# EAGLE board MainFeederV1.0 (EAGLE 9.5.2)
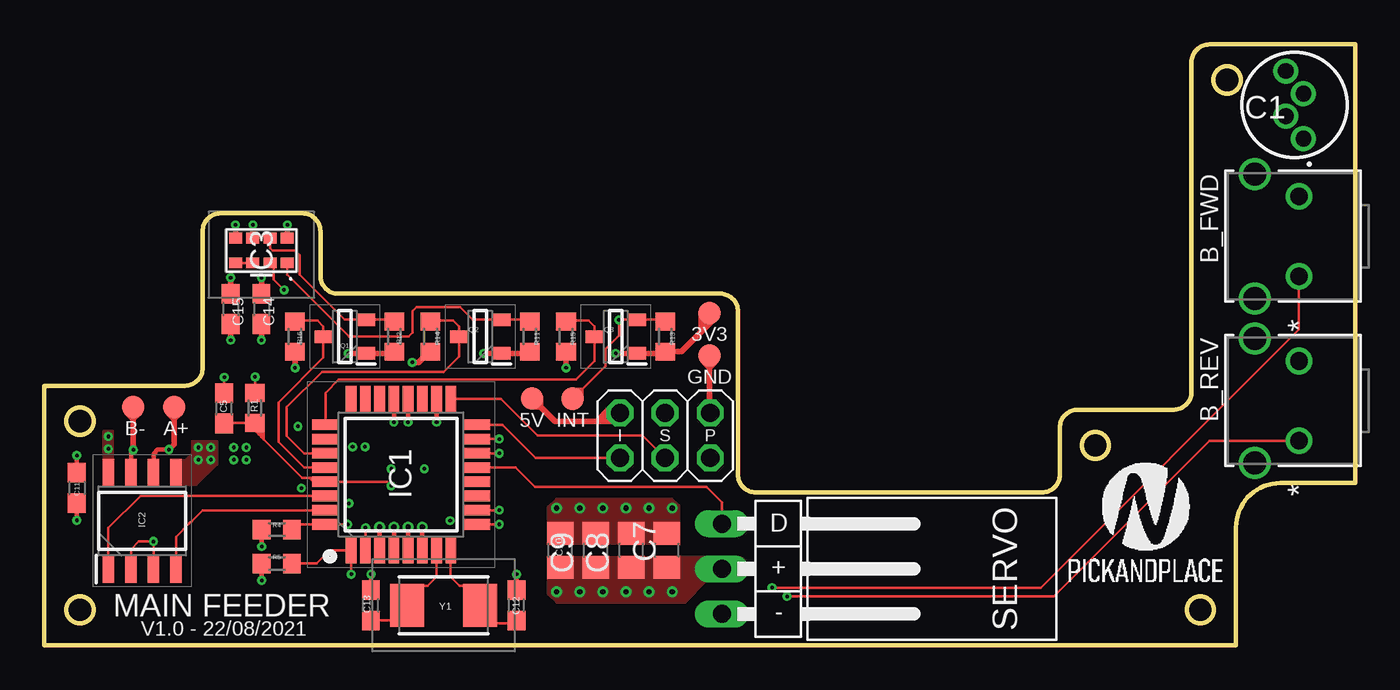
[diagram p0: board, top side]
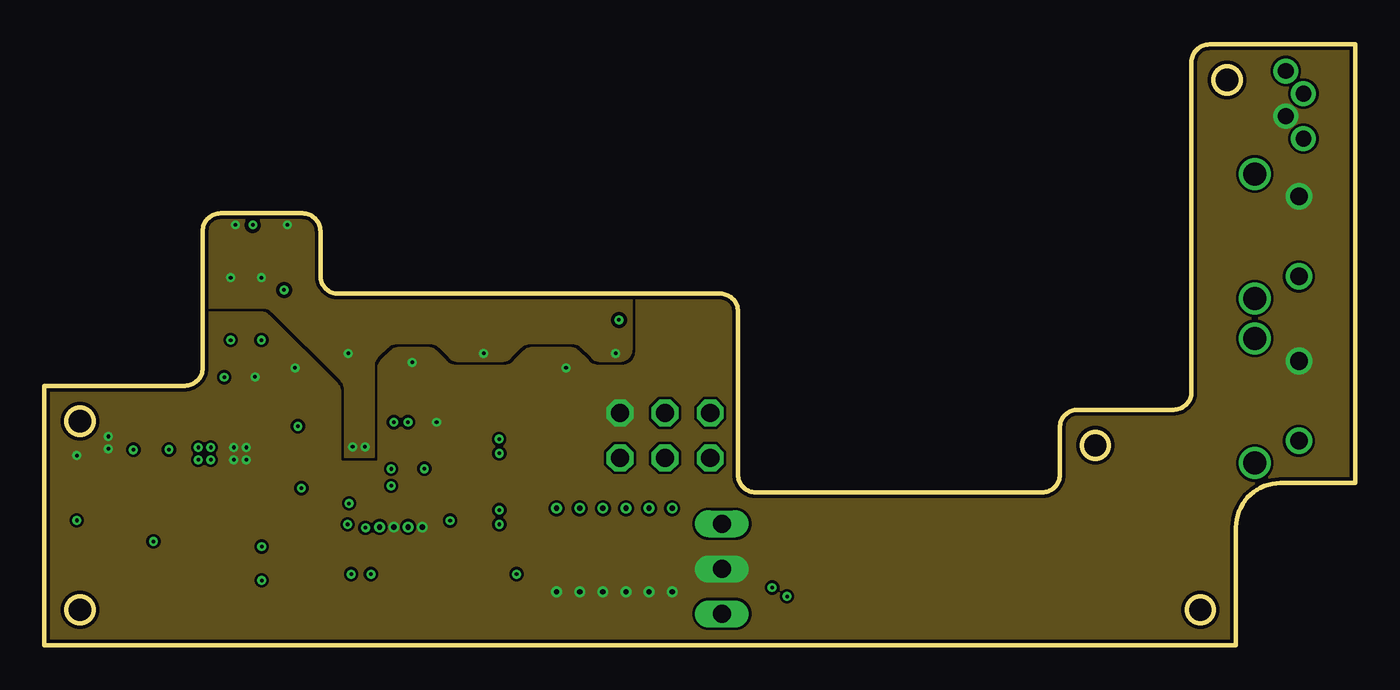
[diagram p1: board, inner layer Route2]
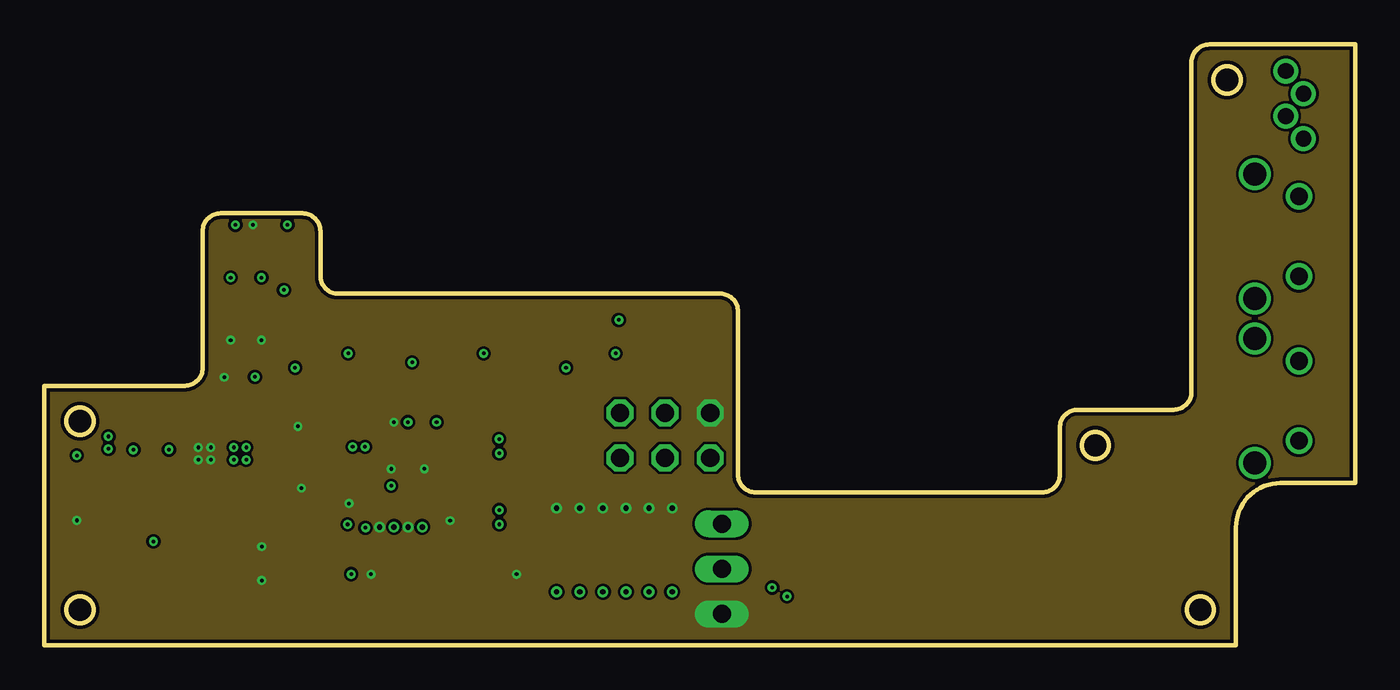
[diagram p2: board, inner layer Route15]
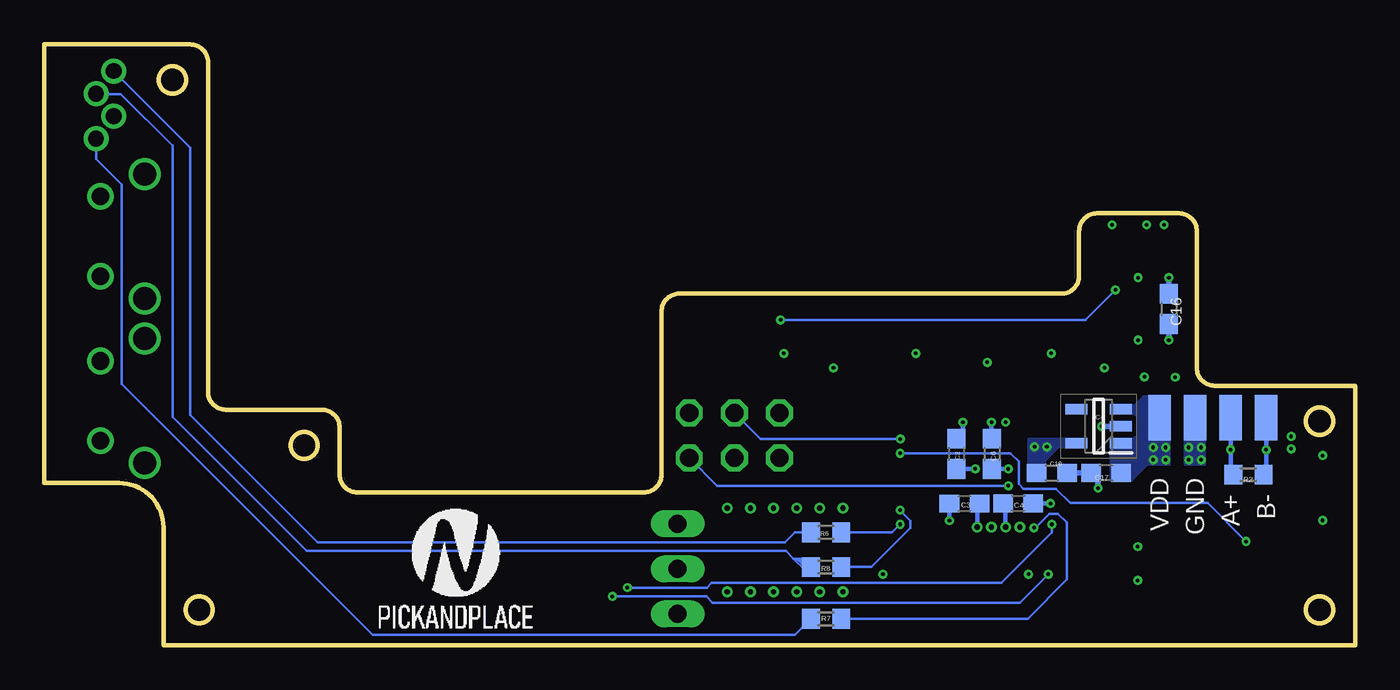
[diagram p3: board, bottom side, seen from below]

Size 73.7 x 33.8 mm. Coordinates in mm from the lower left corner, seen from the top.
Outline: 69.5,9.12 73.7,9.12 73.7,33.8 65.5,33.8 arc90 64.5,32.8 64.5,14.25 arc-90 63.5,13.25 58.1,13.25 arc90 57.1,12.25 57.1,9.6 arc-90 56.1,8.6 40,8.6 arc-90 39,9.6 39,18.78 arc90 38,19.78 16.52,19.78 arc-90 15.52,20.78 15.52,23.3 arc90 14.52,24.3 9.9,24.3 arc90 8.9,23.3 8.9,15.6 arc-90 7.9,14.6 0,14.6 0,0 67,0 67,6.62 arc-90 69.5,9.12
Outline: circle at 66.5,31.8 radius 0.75
Outline: circle at 65,2 radius 0.75
Outline: circle at 59.1,11.25 radius 0.75
Outline: circle at 2,2 radius 0.75
Outline: circle at 2,12.6 radius 0.75
Copper layers (1+2*15+16): Top 0.035mm / dielectric 0.2mm / Route2 0.018mm / dielectric 1.5mm / Route15 0.018mm / dielectric 0.2mm / Bottom 0.035mm
Design rules "aisler_4_layer": minimum track width 0.1mm, minimum drill 0.2mm, track to track 0.15mm, track to pad 0.1mm, pad to pad 0.1mm, via to via 0.1mm, smd to smd 0.1mm, copper to edge 0.2mm, drill to drill 0.21mm, minimum pad ring 0.25mm, minimum via ring 0.15mm, stop-mask expansion 0mil, vias tented up to drill 0mil, thermal gap 10mil

## Footprints (pad centres in the part's own frame; a part is rotated, then mirrored left to right if it is on the bottom)
L-154A4SUREQBFZGEC = drill 0.889 pad 1.4: 1 0.5,-1.905; 2 -0.5,-0.635; 3 0.5,0.635; 4 -0.5,1.905
C0603 = smd 1.1 x 1: 1 -0.85,0; 2 0.85,0
C0805 = smd 1.3 x 1.5: 1 -0.95,0; 2 0.95,0
QFP80P900X900X120-32N = smd 1.5 x 0.6: 1 -4.25,2.8; 2 -4.25,2; 3 -4.25,1.2; 4 -4.25,0.4; 5 -4.25,-0.4; 6 -4.25,-1.2; 7 -4.25,-2; 8 -4.25,-2.8; 17 4.25,-2.8; 18 4.25,-2; 19 4.25,-1.2; 20 4.25,-0.4; 21 4.25,0.4; 22 4.25,1.2; 23 4.25,2; 24 4.25,2.8 | smd 0.6 x 1.5: 9 -2.8,-4.25; 10 -2,-4.25; 11 -1.2,-4.25; 12 -0.4,-4.25; 13 0.4,-4.25; 14 1.2,-4.25; 15 2,-4.25; 16 2.8,-4.25; 25 2.8,4.25; 26 2,4.25; 27 1.2,4.25; 28 0.4,4.25; 29 -0.4,4.25; 30 -1.2,4.25; 31 -2,4.25; 32 -2.8,4.25
SOIC127P600X175-8N = smd 1.525 x 0.65: 1 -2.712,1.905; 2 -2.712,0.635; 3 -2.712,-0.635; 4 -2.712,-1.905; 5 2.712,-1.905; 6 2.712,-0.635; 7 2.712,0.635; 8 2.712,1.905
LTR559ALS01 = smd 0.6 x 0.72: 1 0.7,1.455; 2 0.7,0.485; 3 0.7,-0.485; 4 0.7,-1.455; 5 -0.7,-1.455; 6 -0.7,-0.485; 7 -0.7,0.485; 8 -0.7,1.455
SOT95P275X110-5N = smd 1.25 x 0.6: 1 -1.25,0.95; 2 -1.25,0; 3 -1.25,-0.95; 4 1.25,-0.95; 5 1.25,0.95
1X03/90 = drill 1.016 long: 1 -2.54,-3.81; 2 0,-3.81; 3 2.54,-3.81
2X03 = drill 1.016 octagon: 1 -2.54,-1.27; 2 -2.54,1.27; 3 0,-1.27; 4 0,1.27; 5 2.54,-1.27; 6 2.54,1.27
SMD1,27-2,54 = smd 1.27 x 2.54: 1 0,0
SOT95P240X120-3N = smd 1 x 0.7: 1 -1.2,0.95; 2 -1.2,-0.95; 3 1.2,0
R0603 = smd 1 x 1.1: 1 -0.85,0; 2 0.85,0
SW2_1825027-A_TEC = drill 0.991 pad 1.499: 1 0,0; 2 4.496,0 | drill 1.295 pad 1.803: 3 -1.245,2.489; 4 5.766,2.489
B1,27 = smd 1.27 x 1.27: TP 0,0
ECS1601230AEMTR = smd 1.9 x 2.4: 1 -2.05,0; 2 2.05,0

## Placement (x,y rotation side)
C1  WP154A4SEJ3VBDZGC_CA  [L-154A4SUREQBFZGEC]  70.3,30.4 0 top
C2  1uF  [C0603]  22.42,10.77 270 bottom
C3  100nF  [C0603]  21.96,7.97 180 bottom
C4  100nF  [C0603]  18.95,7.98 0 bottom
C5  100nF  [C0603]  10.11,13.33 90 top
C6  100nF  [C0603]  20.42,10.77 270 bottom
C7  100uF  [C0805]  35,5.34 90 top
C8  100uF  [C0805]  33,5.34 90 top
C9  100uF  [C0805]  31,5.34 90 top
C10  100uF  [C0805]  29,5.34 90 top
C11  100nF  [C0603]  1.82,8.85 270 top
C12  12pF  [C0603]  26.55,2.25 90 top
C13  12pF  [C0603]  18.35,2.25 90 top
C14  1uF  [C0603]  12.2,18.92 270 top
C15  1uF  [C0603]  10.47,18.92 270 top
C16  100nF  [C0603]  10.47,18.92 270 bottom
C17  1uF  [C0603]  14,9.7 180 bottom
C18  1uF  [C0603]  17.05,9.7 0 bottom
IC1  ATMEGA328-AU  [QFP80P900X900X120-32N]  20.05,9.6 90 top
IC2  MAX485CSA+T  [SOIC127P600X175-8N]  5.5,7 90 top
IC3  LTR-559ALS-01  [LTR559ALS01]  12.2,22.21 270 top
IC4  NCP164CSN330T1G  [SOT95P275X110-5N]  14.41,12.32 180 bottom
JP1  [1X03/90]  41.9,4.3 270 top
JP2  [2X03]  34.9,11.8 0 top
PAD1  [SMD1,27-2,54]  7,12.8 0 bottom
PAD2  [SMD1,27-2,54]  5,12.8 0 bottom
PAD3  [SMD1,27-2,54]  9,12.8 0 bottom
PAD4  [SMD1,27-2,54]  11,12.8 0 bottom
Q1  BSS138  [SOT95P240X120-3N]  16.89,17.37 180 top
Q2  BSS138  [SOT95P240X120-3N]  24.5,17.37 180 top
Q3  BSS138  [SOT95P240X120-3N]  32.12,17.37 180 top
R1  10K  [R0603]  11.84,13.35 90 top
R2  220  [R0603]  6,9.6 180 bottom
R4  10K  [R0603]  13.07,6.5 0 top
R5  10K  [R0603]  13.07,4.6 0 top
R6  560  [R0603]  29.75,6.35 180 bottom
R7  560  [R0603]  29.75,1.49 180 bottom
R8  560  [R0603]  29.75,4.4 180 bottom
R11  10K  [R0603]  27.3,17.37 270 top
R12  10K  [R0603]  19.68,17.37 270 top
R13  10K  [R0603]  34.92,17.37 270 top
R14  10K  [R0603]  21.71,17.37 270 top
R15  10K  [R0603]  29.33,17.37 270 top
R16  10K  [R0603]  14.09,17.37 270 top
SW1  1-1825027-1  [SW2_1825027-A_TEC]  70.55,11.5 90 top
SW2  1-1825027-1  [SW2_1825027-A_TEC]  70.55,20.75 90 top
TP1  TPB1,27  [B1,27]  37.4,18.7 0 top
TP2  TPB1,27  [B1,27]  37.4,16.3 0 top
TP3  TPB1,27  [B1,27]  27.41,13.89 0 top
TP4  TPB1,27  [B1,27]  5,13.4 0 top
TP5  TPB1,27  [B1,27]  7.3,13.4 0 top
TP6  TPB1,27  [B1,27]  29.7,13.87 0 top
U$2  [NPNP_LARGE_TEXT]  61.9,7.5 0 top
U$3  [NPNP_LARGE_TEXT]  50.6,4.9 0 bottom
Y1  ECS-160-12-30-AEM-TR  [ECS1601230AEMTR]  22.45,2.25 180 top

## Library data of the parts
C1 = SamacSys_Parts; DESCRIPTION: Standard LEDs - Through Hole 5MM RGB LED; HEIGHT: mm; MANUFACTURER_NAME: Kingbright; MANUFACTURER_PART_NUMBER: WP154A4SEJ3VBDZGC/CA; MOUSER_PART_NUMBER: 604-WP154A43VBDZGCCA; MOUSER_PRICE-STOCK: https://www.mouser.co.uk/ProductDetail/Kingbright/WP154A4SEJ3VBDZGC-CA?qs=YCa%2FAAYMW01T13YiwBKGSw%3D%3D
C2-C18 = rcl; SPICEPREFIX: C
IC1 = SamacSys_Parts; DESCRIPTION: MCU 8-Bit AVR 32KB Flash 2.5/3.3/5V ATMEGA328-AU, 8 bit AVR Microcontroller 20MHz 32 kB Flash, 1 kB, 2 kB RAM, I2C 32-Pin TQFP; HEIGHT: 1.2mm; MANUFACTURER_NAME: Microchip; MANUFACTURER_PART_NUMBER: ATMEGA328-AU; MOUSER_PART_NUMBER: 556-ATMEGA328-AU; MOUSER_PRICE-STOCK: https://www.mouser.co.uk/ProductDetail/Microchip-Technology-Atmel/ATMEGA328-AU?qs=lwdSMh1%2FoYJRHuGBjWz9Pg%3D%3D
IC2 = SamacSys_Parts; DESCRIPTION: RS-422/RS-485 Interface IC Low-Power, Slew-Rate-Limited RS-485/RS-422 Transceivers; HEIGHT: 1.75mm; MANUFACTURER_NAME: Maxim Integrated; MANUFACTURER_PART_NUMBER: MAX485CSA+T; MOUSER_PART_NUMBER: 700-MAX485CSAT; MOUSER_PRICE-STOCK: https://www.mouser.co.uk/ProductDetail/Maxim-Integrated/MAX485CSA%2bT?qs=LHmEVA8xxfYLnNxfn7yuwQ%3D%3D
IC3 = SamacSys_Parts; DESCRIPTION: Light to Digital Converters Ambient Light Photo Sensor; HEIGHT: 1.5mm; MANUFACTURER_NAME: Lite-On; MANUFACTURER_PART_NUMBER: LTR-559ALS-01; MOUSER_PART_NUMBER: 859-LTR559ALS01; MOUSER_PRICE-STOCK: https://www.mouser.co.uk/ProductDetail/Lite-On/LTR-559ALS-01?qs=g5ciJ0jwZaFszfH9HZ6uUw%3D%3D
IC4 = SamacSys_Parts; DESCRIPTION: LDO Regulator Pos 3.3V 0.3A 5-Pin TSOP T/R; HEIGHT: 1.1mm; MANUFACTURER_NAME: ON Semiconductor; MANUFACTURER_PART_NUMBER: NCP164CSN330T1G; MOUSER_PART_NUMBER: 863-NCP164CSN330T1G; MOUSER_PRICE-STOCK: https://www.mouser.co.uk/ProductDetail/ON-Semiconductor/NCP164CSN330T1G?qs=xZ%2FP%252Ba9zWqbi%2FAyy5UtoRw%3D%3D
JP1 JP2 = pinhead
PAD1-PAD4 = wirepad
Q1-Q3 = SamacSys_Parts; DESCRIPTION: N-channel MOSFET,BSS138 0.2A 50V; HEIGHT: 1.2mm; MANUFACTURER_NAME: ON Semiconductor; MANUFACTURER_PART_NUMBER: BSS138; MOUSER_PART_NUMBER: 512-BSS138; MOUSER_PRICE-STOCK: https://www.mouser.co.uk/ProductDetail/ON-Semiconductor-Fairchild/BSS138?qs=HK%252BeIG1iaahCeqBvjB4arg%3D%3D
R1 R2 R4-R8 R11-R16 = rcl; SPICEPREFIX: R
SW1 SW2 = PNPFeeder; BUILT_BY: EMA_UL_Team; CONFIGURATION__POLE-THROW_: Single Pole - Single Throw; CONTACT_CURRENT_RATING: 50; COPYRIGHT: Copyright (C) 2016 Accelerated Designs. All rights reserved; DESCRIPTION: FSMRA4JH04=R/A,TACT PB SW,160G; MANUFACTURER_PART_NUMBER: 1-1825027-1; MAX_SWITCHING_CURRENT: -; MAX_SWITCHING_VOLTAGE_AC_: -; PRODUCT_TYPE: Switch; SOURCELIBRARY: TE_Connectivity-2018-03-16; SWITCH_TYPE: Tactile Switches; TE_INTERNAL_NUMBER: 1-1825027-1; TE_PART_NUMBER: 1-1825027-1; VENDOR: TE Connectivity; VOLTAGE_RATING: -
TP1-TP6 = testpad
U$2 U$3 = PNPFeeder
Y1 = SamacSys_Parts; DESCRIPTION: ECX-53 SMD CRYSTAL; HEIGHT: 1.4mm; MANUFACTURER_NAME: ECS; MANUFACTURER_PART_NUMBER: ECS-160-12-30-AEM-TR; MOUSER_PART_NUMBER: 520-160-12-30-AEM-TR; MOUSER_PRICE-STOCK: https://www.mouser.co.uk/ProductDetail/ECS/ECS-160-12-30-AEM-TR?qs=DRkmTr78QAR%252BNhBpMq%2FA3Q%3D%3D

## Nets
3V3: C14.1 C15.1 C16.1 C18.1 IC3.5 IC3.8 IC4.5 Q1.1 Q2.1 Q3.1 R11.2 R12.2 R13.2 TP1.TP
!RESET: C5.1 IC1.29 JP2.5 R1.1
A+: IC2.6 PAD1.1 R2.2 TP5.TP
B-: IC2.7 PAD2.1 R2.1 TP4.TP
BUTTON_A: IC1.32 R4.2 SW2.1
BUTTON_B: IC1.1 R5.2 SW1.1
C_SERVO: IC1.13 JP1.1
CTRL: IC1.14 IC2.2 IC2.3
GND: C2.2 C3.2 C4.2 C5.2 C6.2 C7.2 C8.2 C9.2 C10.2 C11.2 C12.2 C13.2 C14.2 C15.2 C16.2 C17.2 C18.2 IC1.3 IC1.5 IC1.21 IC2.5 IC3.6 IC4.2 JP1.3 JP2.6 PAD3.1 R4.1 R5.1 TP2.TP
INT: IC1.25 Q3.3 R15.1
INT_3V3: IC3.2 Q3.2 R13.1 TP6.TP
L_B: IC1.10 R8.1
L_G: IC1.9 R6.1
L_R: IC1.2 R7.1
MISO: IC1.16 JP2.1
MOSI: IC1.15 JP2.4
N$1: C6.1 IC1.20
N$2: C1.3 R8.2
N$3: C1.1 R7.2
N$4: IC3.3 IC3.4
N$6: C12.1 IC1.8 Y1.1
N$7: C1.4 R6.2
N$8: C13.1 IC1.7 Y1.2
RX: IC1.30 IC2.1
SCK: IC1.17 JP2.3
SCL: IC1.28 Q1.3 R16.1
SCL_3V3: IC3.7 Q1.2 R12.1
SDA: IC1.27 Q2.3 R14.1
SDA_3V3: IC3.1 Q2.2 R11.1
TX: IC1.31 IC2.4
VDD: C1.2 C2.1 C3.1 C4.1 C7.1 C8.1 C9.1 C10.1 C11.1 C17.1 IC1.4 IC1.6 IC1.18 IC2.8 IC4.1 IC4.3 JP1.2 JP2.2 PAD4.1 R1.2 R14.2 R15.2 R16.2 SW1.2 SW2.2 TP3.TP

## Tracks (layer width: path | path; a pad name or v marks a point on that pad's centre or on a via)
3V3  (via drill 0.2)
  Top 0.305: R12.2 19.58,16.42 Q1.1 v17.08,16.42 | R11.2 27.2,16.42 Q2.1 v24.7,16.42 | v32.12,16.42 Q3.1 34.82,16.42 R13.2 35.82,16.52 36.92,17.62 | IC3.8 v13.66,23.64 v13.66,23.65 | C16.1 v10.47,20.68 | TP1.TP 37.58,18.52 37.58,18.28 37.05,17.75 | 36.92,17.62 37.05,17.75 | 37.05,17.75 37.05,18.35 TP1.TP | TP1.TP 36.92,18.7 36.92,17.62 | C14.1 v12.2,20.68 | IC3.5 v10.74,23.64 v10.74,23.65
  Bottom 0.305: C16.1 v10.47,20.68
  other vias: 18.03,11.16 17.33,11.16
  pour Bottom (no thermals): 15.16,11.16 16.65,11.16 17.43,10.38 17.43,10.09 18.37,10.09 18.38,10.08 18.38,11.6 15.41,11.6 15.16,11.35
  pour Route2 (isolate 0.2): 16.9,10.6 18.5,10.6 18.5,15.74 arc-45 18.69,16.19 19.31,16.81 arc-45 19.76,17 21.74,17 arc-45 22.19,16.81 22.81,16.19 arc45 23.26,16 25.74,16 arc45 26.19,16.19 26.81,16.81 arc-45 27.26,17 29.74,17 arc-45 30.19,16.81 30.81,16.19 arc45 31.26,16 32.37,16 arc90 33,16.63 33,20 17,20 16,21 16,25 8,25 8,19 12.34,19 arc-45 12.79,18.81 16.71,14.89 arc-45 16.9,14.44
!RESET  (via drill 0.2)
  Top 0.15: IC1.29 15.58,9.42 14.88,9.42 | 14.88,9.42 14.48,9.42 12.32,11.58 | IC1.29 15.1,9.2 14.88,9.42 | R1.1 11.84,12.06 12.05,11.85 | 12.05,11.85 12.19,11.71 | 12.19,11.71 12.32,11.58 | R1.1 12.32,12.02 12.32,11.58 | R1.1 12.19,12.15 12.19,11.71 | R1.1 12.05,12.29 12.05,11.85 | R1.1 10.13,12.5 C5.1 | IC1.29 19,9.2 19.07,9.2 19.27,9.2 v19.5,8.97
  Bottom 0.15: JP2.5 35.88,8.97 v19.5,8.97
A+  (via drill 0.2)
  Top 0.254: v7,11.01 6.38,11.01 6.13,10.77 IC2.6
  Top 0.305: TP5.TP 7.3,12.72 | v7,11.01 7.3,11.31 7.3,12.72 | 7.3,12.72 7.66,13.08 | 7.3,12.72 6.98,13.04
  Bottom 0.254: PAD1.1 v7,11.01 7,9.75 R2.2
B-  (via drill 0.2)
  Top 0.254: IC2.7 4.87,10.87 v5,11
  Top 0.305: TP4.TP 5,12.72 | v5,11 5,12.72 | 5,12.72 4.63,13.09 | 5,12.72 5.36,13.08
  Bottom 0.254: PAD2.1 v5,11 5,9.75 R2.1
BUTTON_A  (via drill 0.2)
  Top 0.15: SW2.1 70.55,17.75 56.05,3.25 v40.92,3.25 | R4.2 13.92,6.8 IC1.32 v17.05,6.8
  Bottom 0.15: v40.92,3.25 36.45,3.25 36.18,3.52 19.88,3.52 17.05,6.35 v17.05,6.8
BUTTON_B  (via drill 0.2)
  Top 0.15: SW1.1 65.5,11.5 56.75,2.75 v41.76,2.75 | R5.2 15.3,4.6 16.05,5.35 IC1.1 v17.25,4
  Bottom 0.15: v41.76,2.75 36.47,2.75 36.12,2.4 18.85,2.4 v17.25,4
C_SERVO
  Top 0.15: JP1.1 38.09,8.05 37.24,8.9 27.58,8.9 26.48,10 IC1.13
CTRL  (via drill 0.2)
  Top 0.15: IC2.3 v6.13,5.83 v6.13,5.84 5.3,5.84 4.87,5.4 IC2.2 | IC1.14 v25.58,10.8
  Bottom 0.15: v6.13,5.84 v6.13,5.85 8.28,8 16,8 16.81,8.81 18.65,8.81 18.91,9.07 18.91,10.33 19.38,10.8 v25.58,10.8
GND  (via drill 0.2, 0.3)
  Top 0.15: C5.2 v10.11,15.08
  Top 0.254: R4.1 v12.22,5.55 | R5.1 v12.22,3.65 | IC1.3 v18.85,6.65 | IC1.5 v20.45,6.65 | IC1.21 v19.65,12.55 | C11.2 v1.82,7.03 | C13.2 v18.36,4 | C12.2 v26.55,4
  Top 0.305: IC3.6 v11.72,23.64 v11.72,23.65 | C14.2 v12.2,17.17 | C16.2 v10.47,17.17 | TP2.TP 37.4,15.62 | 37.4,15.62 37.4,13.11 JP2.6 | 37.4,15.62 37.08,15.94 37.08,16.22 | 37.72,16.2 37.72,15.94 37.4,15.62
  Bottom 0.254: C4.2 v17.13,7.98 | C3.2 v22.81,7.01 | C6.2 v19.5,9.92 | C2.2 v21.37,9.92 v21.36,9.93
  Bottom 0.305: IC4.2 v14.25,12.32 | C18.2 C17.2 14.45,9.3 v14.45,8.84 | C16.2 v10.47,17.17
  other vias: 9.35,11.13 9.35,10.43 8.65,10.43 8.65,11.13 28.8,7.71 30.1,7.71 31.4,7.71 32.7,7.71 34,7.71 35.3,7.71
  pour Route15 (no thermals): 76,37 -4,37 -4,-3 76,-3
  pour Bottom (no thermals): 9.56,12.8 8.44,12.8 8.44,10.18 9.56,10.18
  pour Top (no thermals): 28.33,5.72 35.67,5.72 35.67,7.87 35.28,8.24 28.78,8.24 28.33,7.78
  pour Top (no thermals): 7.2,10.4 7.91,10.4 8.3,10.79 8.3,11.46 9.7,11.46 9.7,10.18 8.54,9.03 7.2,9.03
INT
  Top 0.15: R15.1 29.37,18.26 30.6,18.26 30.93,17.93 Q3.3 30.93,15.99 29.89,14.95 16.55,14.95 15.8,14.2 IC1.25
INT_3V3  (via drill 0.2)
  Top 0.15: R13.1 34.82,18.32 Q3.2 32.32,18.32 v32.3,18.3 32.3,17.42 31.54,16.66 31.54,15.71 30.26,14.43 | v13.47,19.99 12.88,20.57 12.88,21.31 IC3.2 | 29.84,13.87 TP6.TP 30.26,14.43 | 30.26,14.43 29.68,14.43 | 30.26,14.43 30.26,13.86 29.92,13.52
  Bottom 0.15: v32.3,18.3 15.17,18.3 v13.48,19.99 v13.47,19.99
L_B  (via drill 0.2)
  Top 0.15: IC1.10 v25.58,7.6
  Bottom 0.15: v25.58,7.6 25.58,7.58 25,7 25,6.59 27.19,4.4 R8.1
L_G  (via drill 0.2)
  Top 0.15: IC1.9 v25.58,6.8
  Bottom 0.15: R6.1 26.03,6.35 v25.58,6.8
L_R  (via drill 0.2)
  Top 0.15: IC1.2 v18.05,6.61
  Bottom 0.15: R7.1 18.41,1.49 16.2,3.7 16.2,6.9 16.7,7.4 17.2,7.4 17.99,6.61 v18.05,6.61
MISO
  Top 0.15: JP2.1 27.63,10.53 25.76,12.4 IC1.16
MOSI  (via drill 0.2)
  Top 0.15: IC1.15 v25.57,11.6
  Bottom 0.15: v25.57,11.6 33.43,11.6 JP2.4
N$1  (via drill 0.2)
  Top 0.254: IC1.20 v20.44,12.55
  Bottom 0.254: C6.1 20.44,11.64 v20.44,12.55
N$2
  Bottom 0.15: C1.3 70.77,31 69.4,31 66.5,28.1 66.5,12.85 58.95,5.3 32,5.3 31.57,4.87 | 31.57,4.87 31.4,4.87 | 31.4,4.87 30.82,4.87 30.6,4.65 R8.2 | R8.2 30.73,4.27 30.97,4.27 31.57,4.87 | R8.2 30.93,4.4 31.27,4.74 | 31.27,4.74 31.4,4.87 | R8.2 30.94,4.74 31.27,4.74
N$3
  Bottom 0.15: C1.1 70.8,27.36 69.35,25.91 69.35,14.71 55.24,0.6 31.49,0.6 R7.2
N$4
  Top 0.15: IC3.3 IC3.4
N$6
  Top 0.15: C12.1 26.4,1.25 24.35,1.25 24.5,1.4 Y1.1 24.05,2.7 24.05,3.35 23.35,3.35 22.85,3.85 IC1.8
N$7
  Bottom 0.15: C1.4 65.5,28 65.5,12.95 58.35,5.8 32.05,5.8 31.5,6.35 R6.2
N$8
  Top 0.15: C13.1 19.55,1.4 Y1.2 20.4,2.7 21.05,3.35 21.55,3.35 22.05,3.85 IC1.7
RX
  Top 0.15: IC2.1 3.59,6.59 5.4,8.4 IC1.30
SCK
  Top 0.15: JP2.3 33.63,11.8 27.72,11.8 25.67,13.85 IC1.17
SCL
  Top 0.15: R16.1 14.13,18.26 15.36,18.26 15.68,17.93 Q1.3 15.68,16.19 13.16,13.67 13.16,11.44 14.6,10 IC1.28
SCL_3V3
  Top 0.15: R12.1 19.58,18.32 Q1.2 16.89,18.32 14.36,20.85 14.36,21.94 14.11,22.19 12.84,22.19 12.69,22.34 IC3.7
SDA
  Top 0.15: R14.1 21.75,18.26 22.98,18.26 23.3,17.93 Q2.3 23.3,16.25 22.44,15.38 15.61,15.38 13.63,13.4 13.63,11.78 14.61,10.8 IC1.27
SDA_3V3
  Top 0.15: R11.1 27.2,18.32 Q2.2 24.06,18.32 23.36,19.02 20.92,19.02 20.7,18.8 20.7,17.6 20.47,17.37 17.14,17.37 13.66,20.86 IC3.1
TX
  Top 0.15: IC2.4 7.4,6.1 8.15,6.85 8.3,7 8.9,7.6 IC1.31
VDD  (via drill 0.2, 0.3)
  Top 0.15: R1.2 v11.84,15.1
  Top 0.254: IC1.4 v19.65,6.65 | IC1.6 v21.25,6.65 | IC1.18 v22.05,12.55 | C11.1 v1.82,10.68
  Top 0.305: R14.2 21.66,16.52 21.05,15.91 v20.68,15.91 | R16.2 v14.09,15.61 | R15.2 v29.33,15.61 | TP3.TP 27.89,13.41 | 27.89,13.41 28.72,12.58 31.19,12.58 | JP2.2 31.87,12.58 31.19,12.58 | JP2.2 32.09,13.34 31.78,13.34 31.06,12.62 31.23,12.62 | 31.23,12.62 31.45,12.84 32.13,12.84 JP2.2 | 31.23,12.62 31.19,12.58 | 27.89,13.41 27.38,13.41 | 27.89,13.41 27.89,13.89
  Bottom 0.254: C4.1 19.65,7.83 v19.65,6.65 | v21.25,6.65 21.25,7.83 C3.1 | C2.1 22.05,11.99 v22.05,12.55
  other vias: 11.35,11.13 11.35,10.43 10.65,11.13 28.8,3.01 30.1,3.01 31.4,3.01 32.7,3.01 34,3.01 35.3,3.01 10.65,10.43 3.59,11.75 3.59,11.05
  pour Route2 (rank 2, no thermals): 75,36 -2,36 -2,-3 75,-3
  pour Bottom (no thermals): 13.7,13.5 12.4,13.5 11.91,13.99 10.99,13.99 10.44,13.5 10.44,10.18 11.65,10.18 12.55,9.28 13.72,9.28 13.72,11.6 12.45,11.6 12.2,11.85 12.2,12.8 12.45,13.05 13.7,13.05
  pour Top (no thermals): 39.53,4.31 arc90 38.86,4.98 35.74,4.98 35.76,4.96 28.33,4.96 28.33,2.87 28.78,2.42 36.04,2.42 37.24,3.62 38.84,3.62 arc90
  pour Top (no thermals): 3.34,9.5 3.34,12.06 3.84,12.06 3.84,9.5

## Text on the board
tPlace: B_FWD | 3V3 | B_REV | GND | 5V | INT | B- | A+ | I | S | P | D | + | SERVO | MAIN FEEDER | - | V1.0 - 22/08/2021
bPlace: GND | VDD | B- | A+